# EAGLE board servo_1 (EAGLE 6.5.0)

Size 195.25 x 137.15 mm. Coordinates in mm from the lower left corner, seen from the top.
Outline: 0,0 195.25,1.27 183.82,130.8 1.27,137.15 0,0
Copper layers (1*16): Top 0.035mm / dielectric 1.5mm / Bottom 0.035mm
Design rules "default": minimum track width 10mil, minimum drill 24mil, track to track 8mil, track to pad 8mil, pad to pad 8mil, via to via 8mil, smd to smd 8mil, copper to edge 40mil, drill to drill 8mil, minimum pad ring 10mil, minimum via ring 8mil, stop-mask expansion 4mil, vias tented up to drill 0mil, thermal gap 10mil
Net classes: 0 default: clearance 0.205 mm

## Footprints (pad centres in the part's own frame; a part is rotated, then mirrored left to right if it is on the bottom)
0805 = smd 0.8 x 1.2: 1 -0.9,0; 2 0.9,0
C0805 = smd 1.3 x 1.5: 1 -0.85,0; 2 0.85,0
E5-8,5 = drill 1.016 pad 2.54: + -2.54,0 | drill 1.016 pad 2.54 octagon: - 2.54,0
TO-220-11 = drill 1.1 pad 1.778: 1 -8.5,-9.37; 2 -6.8,-4.29; 3 -5.1,-9.37; 4 -3.4,-4.29; 5 -1.7,-9.37; 6 0,-4.29; 7 1.7,-9.37; 8 3.4,-4.29; 9 5.1,-9.37; 10 6.8,-4.29; 11 8.5,-9.37
DPACK = smd 1 x 1.6: 1 -2.28,-4.8; 3 2.28,-4.8 | smd 5.4 x 6.2: 2 0,2.5
1X02 = drill 1.016 pad 1.88: 1 0,0; 2 2.54,0
MOLEX-1X3 = drill 1.016 pad 1.88 square: 1 0,0 | drill 1.016 pad 1.88: 2 2.54,0; 3 5.08,0
1X03 = drill 1.016: 1 -2.54,0; 2 0,0; 3 2.54,0
HC49/S = drill 0.813: 1 -2.413,0; 2 2.413,0
AMP-188275-8 = smd 1 x 3.5: 1 0,2.54; 2 1.27,-2.54; 3 2.54,2.54; 4 3.81,-2.54; 5 5.08,2.54; 6 6.35,-2.54; 7 7.62,2.54; 8 8.89,-2.54
MA03-1 = drill 1.016 long: 1 -2.54,0; 2 0,0; 3 2.54,0
SO08 = smd 0.61 x 2.21: 1 -1.905,-2.616; 2 -0.635,-2.616; 3 0.635,-2.616; 4 1.905,-2.616; 5 1.905,2.616; 6 0.635,2.616; 7 -0.635,2.616; 8 -1.905,2.616
SOIC127P1032X265-16N = smd 1.981 x 0.533: 1 -4.699,4.445; 2 -4.699,3.175; 3 -4.699,1.905; 4 -4.699,0.635; 5 -4.699,-0.635; 6 -4.699,-1.905; 7 -4.699,-3.175; 8 -4.699,-4.445; 9 4.699,-4.445; 10 4.699,-3.175; 11 4.699,-1.905; 12 4.699,-0.635; 13 4.699,0.635; 14 4.699,1.905; 15 4.699,3.175; 16 4.699,4.445
SOIC127P600X175-8N = smd 1.981 x 0.559: 1 -2.464,1.905; 2 -2.464,0.635; 3 -2.464,-0.635; 4 -2.464,-1.905; 5 2.464,-1.905; 6 2.464,-0.635; 7 2.464,0.635; 8 2.464,1.905
SO18L = smd 0.66 x 2.032: 1 -5.08,-4.902; 2 -3.81,-4.902; 3 -2.54,-4.902; 4 -1.27,-4.902; 5 0,-4.902; 6 1.27,-4.902; 7 2.54,-4.902; 8 3.81,-4.902; 9 5.08,-4.902; 10 5.08,4.902; 11 3.81,4.902; 12 2.54,4.902; 13 1.27,4.902; 14 0,4.902; 15 -1.27,4.902; 16 -2.54,4.902; 17 -3.81,4.902; 18 -5.08,4.902
ARDUINO_PRO_MINI = drill 1.016 pad 1.88: 3 -7.62,7.62; 5 -7.62,2.54; 6 -7.62,0; 7 -7.62,-2.54; 8 -7.62,-5.08; 9 -7.62,-7.62; 10 -7.62,-10.16; 11 -7.62,-12.7; 12 -7.62,-15.24; 13 7.62,-15.24; 14 7.62,-12.7; 15 7.62,-10.16; 16 7.62,-7.62; BLK -6.35,15.24; GND -3.81,15.24; GRN 6.35,15.24; RXI 1.27,15.24; TXO 3.81,15.24; VCC -1.27,15.24
90-2 = drill 1.422 long: 1 -1.75,5.25; 2 1.75,5.25

## Placement (x,y rotation side)
C1  22pF  [0805]  24.13,127 0 top
C2  22pF  [0805]  20.32,127 0 top
C3  100nF  [C0805]  -8.89,-88.9 0 top  (outside the outline)
C4  22uF  [E5-8,5]  3.81,-52.07 0 top  (outside the outline)
C5  22uF  [E5-8,5]  3.81,-62.23 0 top  (outside the outline)
C6  100nF  [C0805]  -8.89,-92.71 0 top  (outside the outline)
C7  100nF  [C0805]  -20.32,-99.06 0 top  (outside the outline)
C8  100nF  [C0805]  -20.32,-105.41 0 top  (outside the outline)
IC1  LM18200T  [TO-220-11]  118.11,54.61 0 top
IC3  MC33269D-3.3  [DPACK]  -29.21,-114.3 0 top  (outside the outline)
JP1  end_lign  [1X02]  53.34,128.27 0 top
JP2  servo5  [MOLEX-1X3]  1.27,-34.29 0 top  (outside the outline)
JP3  servo7  [MOLEX-1X3]  10.16,-34.29 0 top  (outside the outline)
JP4  servo6  [MOLEX-1X3]  81.28,66.04 270 top
JP5  12V-5V  [1X03]  -6.35,-81.28 0 top  (outside the outline)
JP6  RX_TX_Connxion  [1X02]  1.27,17.78 0 top
JP7  servo1  [MOLEX-1X3]  95.25,45.72 0 top
JP8  servo3  [MOLEX-1X3]  1.27,-15.24 0 top  (outside the outline)
JP9  servo2  [MOLEX-1X3]  1.27,-21.59 0 top  (outside the outline)
JP10  servo4  [MOLEX-1X3]  1.27,-27.94 0 top  (outside the outline)
Q1  16MHz  [HC49/S]  26.67,115.57 0 top
R1  4,7k  [0805]  16.51,127 0 top
R2  120  [0805]  12.7,127 0 top
SK3  CAN_BUS  [AMP-188275-8]  10.16,115.57 0 top
SV1  [MA03-1]  -16.51,-111.76 0 top  (outside the outline)
SV2  [MA03-1]  -16.51,-118.11 0 top  (outside the outline)
U1  MCP2551  [SO08]  3.81,114.3 0 top
U2  ADUM1400ARWZ  [SOIC127P1032X265-16N]  99.06,93.98 0 top
U3  ADUM1250ARZ  [SOIC127P600X175-8N]  40.64,102.87 0 top
U4  ADUM1400ARWZ  [SOIC127P1032X265-16N]  140.97,85.09 0 top
U$2  MCP2515SO  [SO18L]  40.64,116.84 0 top
U$3  ARDUINO_PRO_MINI'SERVO  [ARDUINO_PRO_MINI]  163.83,104.14 0 top
X1  5V_INPUT  [90-2]  111.76,76.2 0 top
X2  12V_INPUT  [90-2]  74.93,53.34 270 top
X5  MOT_OUTPUT  [90-2]  -7.62,-72.39 0 top  (outside the outline)

## Library data of the parts
C1 C2 = SparkFun-Capacitors
C3-C8 = resistor
IC1 = national-semiconductor; OC_FARNELL: unknown; OC_NEWARK: unknown
IC3 = linear
JP1 JP6 R1 R2 = SparkFun-Passives
JP2-JP4 JP7-JP10 = SparkFun-Connectors
JP5 = adafruit
Q1 = adafruit; OC_FARNELL: 1667008; OC_NEWARK: unknown
SK3 = jt-con-micromatch
SV1 SV2 = con-lstb; OC_FARNELL: unknown; OC_NEWARK: unknown
U1 = SparkFun-DigitalIC
U2 U4 = Analog Devices_By_element14_Batch_1; MPN: ADUM1400ARWZ; OC_FARNELL: 1226217; OC_NEWARK: 19M8755; PACKAGE: SOIC-16; SUPPLIER: Analog Devices
U3 = Analog Devices_By_element14_Batch_1; MPN: ADUM1250ARZ; OC_FARNELL: 1814353; OC_NEWARK: 27M9880; PACKAGE: SOIC-8; SUPPLIER: Analog Devices
U$2 = MCP2515_MT
U$3 = can_bus_servo
X1 X2 X5 = con-weidmueller-sl35; OC_FARNELL: unknown; OC_NEWARK: unknown

## Nets
5V_DIRTY: C4.+ C7.1 IC3.2 JP2.2 JP3.2 JP4.2 JP5.1 JP7.2 JP8.2 JP9.2 JP10.2 U2.10 U2.16 U4.10 U4.16 X1.1
12V_DIRTY: C5.+ C8.1 IC3.3 JP5.3 SV1.2 SV2.2 U3.8 X2.1
CAN_CS: U$2.16 U$3.13
CAN_INT: U$2.12 U$3.5
CAN_RXD: U1.4 U$2.2
CAN_TXD: U1.1 U$2.1
CANH: JP1.2 SK3.4 SK3.5 U1.7
CANL: R2.1 SK3.3 SK3.6 U1.6
GND: C1.1 C2.1 R1.2 SK3.1 SK3.8 U1.3 U2.2 U2.8 U3.4 U4.2 U4.8 U$2.9 U$3.GND
GND_DIRTY: C4.- C5.- C7.2 C8.2 IC1.4 IC1.7 IC3.1 JP2.3 JP3.3 JP4.3 JP7.3 JP8.3 JP9.3 JP10.3 SV1.1 SV2.1 U2.9 U2.15 U3.5 U4.9 U4.15 X1.2 X2.2
MISO: U$2.15 U$3.15
MOSI: U$2.14 U$3.14
N$1: C3.2 IC1.1
N$2: C1.2 Q1.2 U$2.7
N$3: C2.2 Q1.1 U$2.8
N$4: C6.2 IC1.11
N$5: R1.1 U1.8
N$7: JP1.1 R2.2
N$9: C3.1 IC1.2 X5.1
N$10: C6.1 IC1.10 X5.2
PWM3: U2.3 U$3.6
PWM3_OUT: JP7.1 U2.14
PWM4: U2.4 U$3.7
PWM4_OUT: JP8.1 U2.13
PWM5: U2.5 U$3.8
PWM5_OUT: JP9.1 U2.12
PWM6: U2.6 U$3.9
PWM6_OUT: JP10.1 U2.11
PWM7: U4.3 U$3.10
PWM7_OUT: JP2.1 U4.14
PWM8: U4.4 U$3.11
PWM8_OUT: IC1.5 JP3.1 U4.13
PWM9: U4.5 U$3.12
PWM9_OUT: IC1.3 JP4.1 U4.12
RST: U$2.17 U$3.3
RXI: JP6.2 U3.3 U$3.RXI
RXTX_OUT: SV1.3 SV2.3 U3.2
SCK: U$2.13 U$3.16
TXO: JP6.1 U$3.TXO
VCC: SK3.2 SK3.7 U1.2 U2.1 U3.1 U4.1 U$2.18 U$3.VCC
VINPUT: IC1.6 JP5.2

## Tracks (layer width: path | path; a pad name or v marks a point on that pad's centre or on a via)
5V_DIRTY  (15 unrouted)
12V_DIRTY  (7 unrouted)
CAN_CS  (1 unrouted)
CAN_INT  (1 unrouted)
CAN_RXD  (1 unrouted)
CAN_TXD  (1 unrouted)
CANH  (3 unrouted)
CANL  (3 unrouted)
GND  (12 unrouted)
GND_DIRTY  (22 unrouted)
MISO  (1 unrouted)
MOSI  (1 unrouted)
N$1  (1 unrouted)
N$2  (2 unrouted)
N$3  (2 unrouted)
N$4  (1 unrouted)
N$5  (1 unrouted)
N$7  (1 unrouted)
N$9  (2 unrouted)
N$10  (2 unrouted)
PWM3  (1 unrouted)
PWM3_OUT  (1 unrouted)
PWM4  (1 unrouted)
PWM4_OUT  (1 unrouted)
PWM5  (1 unrouted)
PWM5_OUT  (1 unrouted)
PWM6  (1 unrouted)
PWM6_OUT  (1 unrouted)
PWM7  (1 unrouted)
PWM7_OUT  (1 unrouted)
PWM8  (1 unrouted)
PWM8_OUT  (2 unrouted)
PWM9  (1 unrouted)
PWM9_OUT  (2 unrouted)
RST  (1 unrouted)
RXI  (2 unrouted)
RXTX_OUT  (2 unrouted)
SCK  (1 unrouted)
TXO  (1 unrouted)
VCC  (7 unrouted)
VINPUT  (1 unrouted)
(copper drawn outside any net)
  shapes: Bottom area x2